# Altium PCB Sensor_Box_Simple_IO.PCBDOC
Units mil, origin at the board's own origin, x right, y up, seen from the top; angles counter-clockwise.
Board outline 403.73 x 2876.17 mil, 2 copper layers (Top, Bot), stack 61.855 mil thick; 26 components, 21 nets, 78 pads, 22 vias.
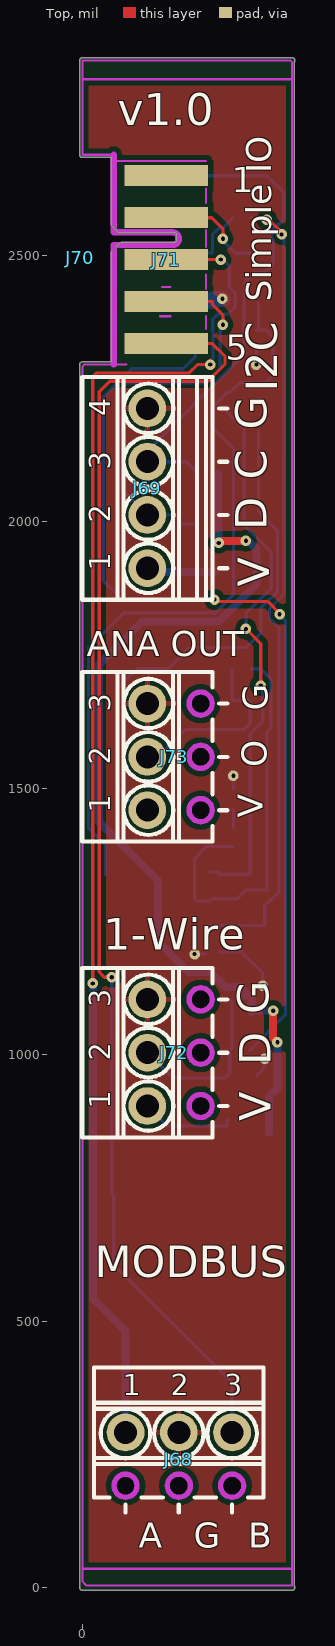
[diagram p0: Top view]
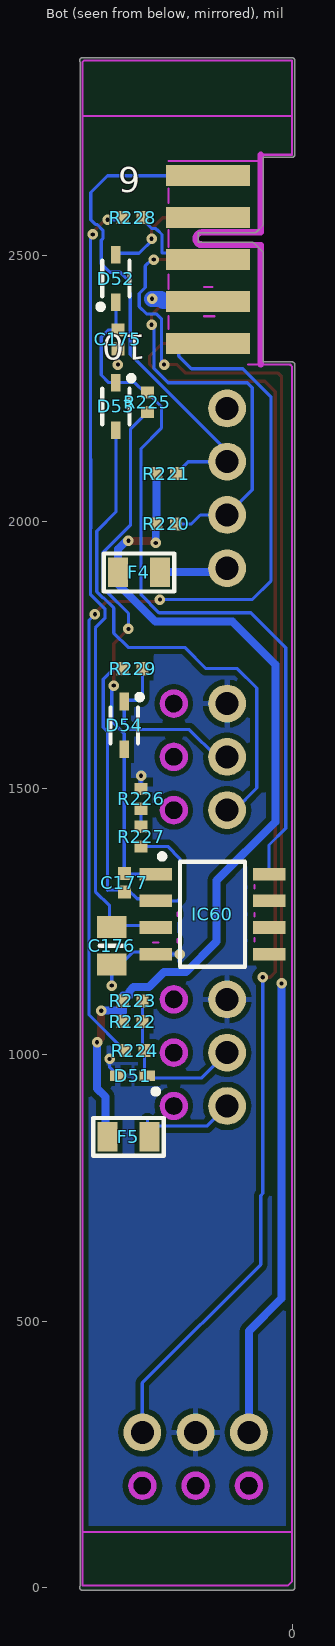
[diagram p1: Bot view, seen from below]
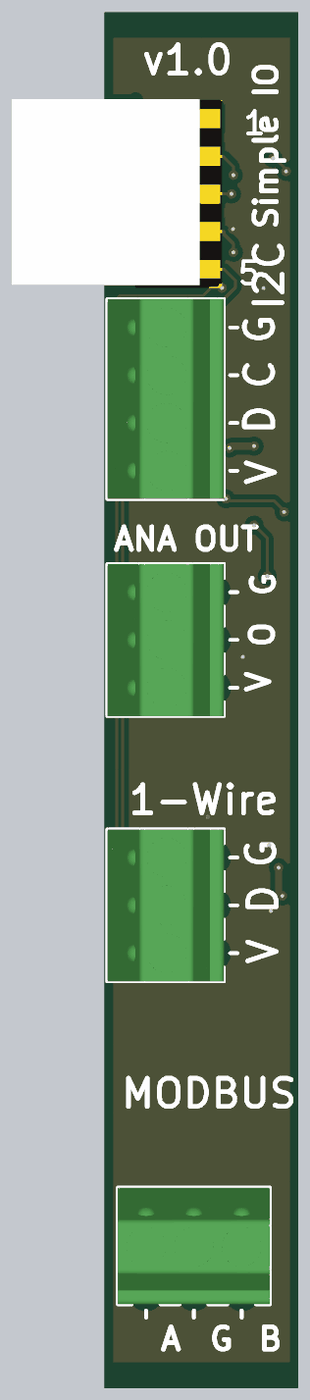
[diagram p2: 3D render of the assembled board from above, using the file's embedded part models]
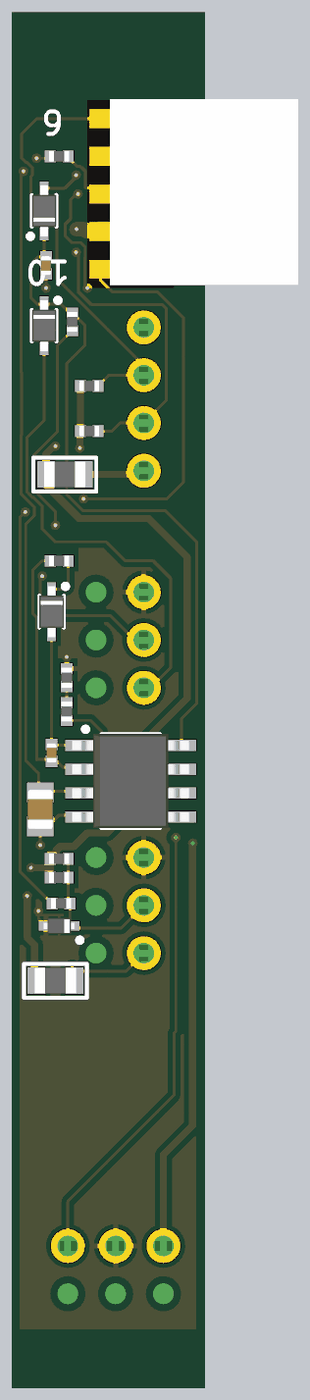
[diagram p3: 3D render of the assembled board from below, using the file's embedded part models]

## Layer stack, top to bottom
TopSolder: solder mask 0.4, Solder Resist, Dk 3.5
Top: signal copper 1.4
Dielectric1: core 59.0551, FR-4, Dk 4.8
Bot: signal copper 1.4
BottomSolder: solder mask 0.4, Solder Resist, Dk 3.5

## Board outline
-5.01,0 ccw(c0,0) 0,-5.02 393.7,-5.02 ccw(c393.7,0) 398.72,0 ccw(c393.7,0) 397.65,3.09 397.65,2863.05 ccw(c393.7,2866.14) 398.72,2866.14 ccw(c393.7,2866.14) 393.7,2871.16 0,2871.16 ccw(c0,2866.14) -5.01,2866.14 -5.01,2688.98 ccw(c0,2688.98) 0,2683.96 54.04,2683.96 54.04,2559.05 ccw(c59.06,2559.05) 55.53,2555.49 55.51,2555.51 67.32,2543.7 67.3,2543.71 ccw(c70.87,2547.24) 70.87,2542.23 176.09,2542.23 176.09,2524.7 74.8,2524.7 ccw(c74.8,2519.68) 71.24,2523.21 71.26,2523.23 55.51,2507.48 55.53,2507.5 ccw(c59.06,2503.94) 54.04,2503.94 54.04,2300.29 0,2300.29 ccw(c0,2295.27) -5.01,2295.27

## Design rules (kind name [scope] priority, off if disabled: settings)
Clearance Clearance_DIFF [(InDifferentialPairClass('All Differential Pairs'))] p1: gap=5 ignorepadtopadclearanceinfootprint=FALSE except(0: Arc-Hole Track-Hole SMDPad-Hole THPad-Hole Via-Hole Fill-Hole Poly-Hole Region-Hole Text-Hole; 10: Arc-Poly Track-Poly SMDPad-Poly THPad-Poly Via-Poly Fill-Poly Poly-Poly Poly-Region Poly-Text)
Clearance [All] p2: gap=6 ignorepadtopadclearanceinfootprint=FALSE except(10: Arc-Poly Track-Poly SMDPad-Poly THPad-Poly Via-Poly Fill-Poly Poly-Poly)
DiffPairsRouting [All] p1: maxlimit=10 minlimit=5 mostfreqgap=5 toplayer_minwidth=5 toplayer_maxwidth=15 toplayer_prefwidth=10 bottomlayer_minwidth=5 bottomlayer_maxwidth=15 bottomlayer_prefwidth=10 maxuncoupledlength=500
FabricationTestPointUsage TestPointUsage [All] p1: valid=0 allowmultiple=FALSE
FabricationTestpoint Testpoint [All] p1: side=3 testpointundercomponent=TRUE minsize=40 maxsize=100 preferedsize=60 minholesize=20 maxholesize=40 preferedholesize=32 testpointgrid=1 allowsidetop=TRUE allowsidebottom=TRUE usegrid=TRUE gridtolerance=0.01
HoleSize [All] p1: absolutevalues=TRUE maxlimit=150 minlimit=1 maxpercent=80.000 minpercent=20.000
HoleToHoleClearance [All] p1: gap=1 allowstackedmicrovias=TRUE
MinimumSolderMaskSliver [All] p1: minsoldermaskwidth=0
PlaneClearance [All] p1: clearance=10
PlaneConnect [All] p1: planeconnectstyle=Direct reliefexpansion=20 reliefentries=4 reliefconductorwidth=10 reliefairgap=10
PolygonConnect PolygonConnect_pad [(InPadClass('All Pads'))] p1: connectstyle=Relief reliefconductorwidth=10 reliefentries=4 polygonreliefangle="90 Angle" airgapwidth=10
PolygonConnect [All] p2: connectstyle=Direct reliefconductorwidth=10 reliefentries=4 polygonreliefangle="45 Angle" airgapwidth=10
RoomDefinition Sensor_Box_Simple_IO [InComponentClass('Sensor_Box_Simple_IO')] p1 off: confinementstyle=ConfineIn formatcopy=TRUE lockcomponents=FALSE outline 793.29,1049.2 7988.16,1049.2 7988.16,1984.24 793.29,1984.24
RoutingVias [All] p1: holewidth=7.87 width=19.68 viastyle="Through Hole" minholewidth=7.87 minwidth=19.68 maxholewidth=28 maxwidth=50
SilkToSilkClearance [All] p1: silktosilkclearance=0
SilkToSolderMaskClearance SilkscreenOverComponentPads [IsPad] p1: minsilkscreentomaskgap=0 clearancetoexposedcopper=TRUE
SolderMaskExpansion [All] p1: expansion=2
Width [All] p1: maxlimit=50 minlimit=5 preferedwidth=5
20 further rules are at their usual default settings.

## Components (designator, comment, footprint, x,y, rotation, side; value= is the part's Value field where it differs from the comment)
C175 "1uF" CAPC1005X55N 326.77,2342.52 r90 bottom
C176 "10uF" CAPC2012X135N 338.58,1204.72 r270 bottom
C177 "18pF" CAPC1005X55N 314.96,1322.83 r270 bottom
D51 "PESD3V3S1UB" SODFL1608X65N 299.21,960.63 r0 bottom
D52 "1N4148WS" SODFL2512X100N 330.71,2456.69 r90 bottom
D53 "1N4148WS" SODFL2512X100N 330.71,2216.54 r270 bottom
D54 "1N4148WS" SODFL2512X100N 314.96,1618.11 r270 bottom
F4 "RFSI050" 0805R 287.4,1905.51 r0 bottom
F5 "RFSI050" 0805R 307.09,846.46 r0 bottom
IC60 "LM358AD" SOIC127P600X175-8N 149.61,1263.78 r180 bottom
J68 "=Family" PHOENIX_1725669 181.1,291.34 r0 top
J69 "=Family" PHOENIX_1725672 122.05,2062.99 r90 top
J70 "=Family" "AVX_00 9159 010 061 916" -3.94,2496.06 r180 top
J71 "=Family" EDGE10T1B6_P200W1000L0F100X400 157.48,2649.61 r270 top
J72 "=Family" PHOENIX_1725669 122.05,1003.94 r90 top
J73 "=Family" PHOENIX_1725669 122.05,1559.06 r90 top
R220 "1k" RESC1005X40N 236.22,1996.06 r180 bottom
R221 "1k" RESC1005X40N 236.22,2090.55 r180 bottom
R222 "10k" RESC1005X40N 299.21,1062.01 r0 bottom
R223 "10k" RESC1005X40N 299.21,1101.38 r0 bottom
R224 "49R9" RESC1005X40N 295.28,1007.87 r0 bottom
R225 "10k" RESC1005X40N 271.65,2224.41 r270 bottom
R226 "10k" RESC1005X40N 283.46,1480.31 r90 bottom
R227 "10k" RESC1005X40N 283.46,1409.45 r90 bottom
R228 "10k" RESC1005X40N 299.21,2570.87 r180 bottom
R229 "10k" RESC1005X40N 299.21,1724.41 r0 bottom

## Footprints (in the part's own frame and the unit in brackets; to place one, negate y for a bottom-side part, rotate by r counter-clockwise, add the part's x,y. Pads: shape width x height; smd on the part's side, far side on the other; paste and mask are expansions set on the pad)
0805R [mm]
  rect 0.95x1.4 smd: 1(-1,0) 2(1,0)
  silkscreen extent -1.68,-0.89 1.68,0.91, body extent -1.1,-0.67 1.1,0.68, height 0.6
"AVX_00 9159 010 061 916" [mil] "10 Contacts, 2mm Pitch, Open Ended Card Edge Connector, 9159 Series"
  body extent -197,-195 197,195, height 67
CAPC1005X55N [mm] "Chip Capacitor, Body 1.0x0.55mm, IPC Medium Density"
  rect 0.62x0.62 smd: 1(-0.45,0) 2(0.45,0)
  body extent -0.52,-0.27 0.53,0.28, height 0.55
CAPC2012X135N [mm] "Chip Capacitor, Body 2.0x1.25mm, IPC Medium Density"
  rect 1.05x1.4 smd: 1(-0.9,0) 2(0.9,0)
  silkscreen extent 0,-0.58 0,0.58, body extent -1.05,-0.67 1.05,0.68, height 1.25
EDGE10T1B6_P200W1000L0F100X400 [mm] "10 contacts Board Edge Connector, First Left Top Pad 1, First Left Bottom Pad 2, Pitch 2mm, Length 0mm, Width 10mm, Finger Lenght 4mm, Finger Width 1mm"
  rect 1x4 smd paste-0.5: 1(0,0) 2(2,0) 3(4,0) 4(6,0) 5(8,0)
  rect 1x4 smd far side paste-0.5: 6(0,0) 7(2,0) 8(4,0) 9(6,0) 10(8,0)
  KeepOutLayer lines w0.3: 9,-2.5 3.3,-2.5 3.3,0.3 ccw(c3,0.3) 2.7,0.3 2.7,-2.5 -1,-2.5
PHOENIX_1725669 [mm] "Micro PCB Terminal Block, Pitch 2.54mm, 3 Positions, Screw Connection"
  round 1.8 hole 1.1: 1(-2.54,0) 2(0,0) 3(2.54,0)
  round 0.5 hole 1.1 unplated mask+0.3: 4(-2.54,-2.54) 5(0,-2.54) 6(2.54,-2.54)
  silkscreen extent -4.04,-3.81 4.04,3.1, body extent -4.04,-3.1 4.04,3.1, height 8.5
PHOENIX_1725672 [mm] "Micro PCB Terminal Block, Pitch 2.54mm, 4 Positions, Screw Connection"
  round 1.8 hole 1.1: 1(-3.81,0) 2(-1.27,0) 3(1.27,0) 4(3.81,0)
  silkscreen extent -5.31,-3.81 5.31,3.1, body extent -5.31,-3.1 5.31,3.1, height 8.5
RESC1005X40N [mm] "Chip Resistor, EIA 0402, Metric 1005, Body 1.0x0.5mm, IPC Medium Density"
  rect 0.58x0.62 smd: 1(-0.47,0) 2(0.47,0)
  body extent -0.52,-0.27 0.53,0.28, height 0.4
SODFL1608X65N [mm] "Ultra Small Outline Diode Flat Lead (SOD-523), Body; 1.2mm L X 0.8mm W X 0.65mm H, IPC Medium Density"
  rect 0.75x0.5 smd: 1(-0.7,0) 2(0.7,0)
  silkscreen extent -1.22,0.63 -0.97,0.87, body extent -0.82,-0.42 0.83,0.43, height 0.65
SODFL2512X100N [mm] "SODFL Diode; 1.70mm W X 1.25mm L X 1.00mm H body, IPC Medium Density"
  rect 0.84x0.46 smd: 1(-1.14,0) 2(1.14,0)
  silkscreen extent -1.47,-0.65 0.85,0.86, body extent -1.35,-0.65 1.35,0.65, height 1
SOIC127P600X175-8N [mm] "SOIC 8, Pitch 1.27mm - Body 4x5mm, IPC Medium Density"
  rect 1.55x0.6 smd: 1(-2.7,1.905) 2(-2.7,0.635) 3(-2.7,-0.635) 4(-2.7,-1.905) 5(2.7,-1.905) 6(2.7,-0.635) 7(2.7,0.635) 8(2.7,1.905)
  silkscreen extent -2.53,-2.5 1.55,2.88, body extent -3.1,-2.5 3.1,2.5, height 1.75

## Part data
C175: library part CC0402_1UF_16V_10%_X5R, "Non-polarised capacitor", Case=0402, Manufacturer=GENERIC, Manufacturer1 ComponentHeight=0.55mm, Manufacturer1 Example=TDK, Manufacturer1 Part Number=C1005X5R1C105KT, Tolerance=±10%, Voltage=16V, Author="CERN DEM JLC", Component Type=Standard, CreateDate=25.10.2012, HelpURL=\\cern.ch\dfs\Applications\Altium\Datasheets\CC0402_X5R_TDK_C.pdf, LatestRevisionDate=25.10.2012, Manufacturer Part Number=CC0402_1UF_16V_10%_X5R, Mounted=Yes, Part Description="SMD Multilayer Chip Ceramic Capacitor", Part Number=CC0402_1UF_16V_10%_X5R, Pin Count=2, Sense=No, SMD=Yes, Socket=No, Status=Preferred, TC=X5R
C176: library part CC0805_10UF_16V_10%_X5R, "Non-polarised capacitor", Case=0805, Manufacturer=GENERIC, Manufacturer1 ComponentHeight=1.4mm, Manufacturer1 Example=KEMET, Manufacturer1 Part Number=C0805C106K4PAC, Tolerance=±10%, Voltage=16V, Author="CERN DEM JLC", Component Type=Standard, CreateDate=03.12.2007, HelpURL=\\cern.ch\dfs\Applications\Altium\Datasheets\CC1206_X5R_KEMET.pdf, LatestRevisionDate=03.12.2007, Manufacturer Part Number=CC0805_10UF_16V_10%_X5R, Mounted=Yes, Part Description="SMD Multilayer Chip Ceramic Capacitor", Part Number=CC0805_10UF_16V_10%_X5R, Pin Count=2, Sense=No, SMD=Yes, Socket=No, Status=Preferred, TC=X5R
C177: library part CC0402_18PF_50V_5%_C0G, "Non-polarised capacitor", Case=0402, Manufacturer=GENERIC, Manufacturer1 ComponentHeight=0.55mm, Manufacturer1 Example=KEMET, Manufacturer1 Part Number=C0402C180J5GACTU, Tolerance=±5%, Voltage=50V, Author="CERN DEM JLC", Component Type=Standard, CreateDate=04.10.2016, HelpURL="\\cern.ch\dfs\Applications\Altium\Datasheets\CC0805_C0G_KEMET_(Commercial Grade).pdf", LatestRevisionDate=04.10.2016, Manufacturer Part Number=CC0402_18PF_50V_5%_C0G, Mounted=Yes, Part Description="SMD Multilayer Chip Ceramic Capacitor", Part Number=CC0402_18PF_50V_5%_C0G, Pin Count=2, Sense=No, SMD=Yes, Socket=No, Status=Preferred, TC=C0G/NP0
D51: "ESD protection diode", Case=SOD523, Manufacturer="NXP SEMICONDUCTORS", Power=330W, Voltage=3V3, Author="CERN DEM JLC", Bonding=No, ComponentHeight=0.65mm, Component Type=Standard, CreateDate=29.11.2012, Device=PESD3V3S1UB, HelpURL=\\cern.ch\dfs\Applications\Altium\Datasheets\PESD3V3S1UB.pdf, LatestRevisionDate=29.11.2012, Manufacturer Part Number=PESD3V3S1UB, Mounted=Yes, PackageDescription="Ultra Small Outline Diode Flat Lead (SOD-523), Body; 1.2mm L X 0.8mm W X 0.65mm H, IPC Medium Density", Part Description="ESD protection diode (23kV)", Part Number=PESD3V3S1UB, Pin Count=2, PressFit=No, Sense=No, SMD=Yes, Socket=No
D52 D53 D54: "Diode", Case=SOD-323F, Manufacturer="FAIRCHILD SEMICONDUCTOR", Power=150mA, Voltage=75V, Author="CERN DEM JLC", Bonding=No, ComponentHeight=1mm, Component Type=Standard, CreateDate=12.05.2011, Device=1N4148WS, HelpURL=\\cern.ch\dfs\Applications\Altium\Datasheets\1N4148WS.pdf, LatestRevisionDate=12.05.2011, Manufacturer Part Number=1N4148WS, Mounted=Yes, PackageDescription="SODFL Diode; 1.70mm W X 1.25mm L X 1.00mm H body, IPC Medium Density", Part Description="Small Signal Diodes", Part Number=1N4148WS, Pin Count=2, PressFit=No, Sense=No, SMD=Yes, Socket=No
F4 F5: library part F_PTC_0.05A, "50mA polymer FUSE"
IC60: "Dual Operational Amplifier", Case=SOIC8, Manufacturer="TEXAS INSTRUMENTS", Author="CERN DEM JLC", Bonding=No, ComponentHeight=1.75mm, Component Type=Standard, CreateDate=02.12.2008, Device=LM358AD, HelpURL=\\cern.ch\dfs\Applications\Altium\Datasheets\LM358AD.pdf, LatestRevisionDate=13.04.2010, Manufacturer Part Number=LM358AD, Mounted=Yes, PackageDescription="SOIC 8, Pitch 1.27mm - Body 4x5mm, IPC Medium Density", Part Description="Dual Operational Amplifier", Part Number=LM358AD, Pin Count=8, PressFit=No, Sense=No, SMD=Yes, Socket=No
J68 J72 J73: library part PHOENIX_1725669, "Terminal Block, 3 Positions, Screw Connection", Manufacturer="PHOENIX CONTACT", Manufacturer Part Number="1725669 (MPT 0,5/3-2,54)", Author="CERN DEM JMW", ComponentHeight=8.5mm, Component Type=Standard, CreateDate=07.11.2008, HelpURL=\\cern.ch\dfs\Applications\Altium\Datasheets\PHOENIX_1725669.pdf, LatestRevisionDate=26.04.2010, Mounted=Yes, Part Description="6A, 63V, Terminal Block, Pitch 2.54mm, 3 Positions, Screw Connection", Part Number=PHOENIX_1725669, Pin Count=3, PressFit=No, Sense=No, SMD=No, Socket=No, Status=None
J69: library part PHOENIX_1725672, "Terminal Block, 4 Positions, Screw Connection", Manufacturer="PHOENIX CONTACT", Manufacturer Part Number="1725672 (MPT 0,5/4-2,54)", Author="CERN DEM JMW", ComponentHeight=8.5mm, Component Type=Standard, CreateDate=07.11.2008, HelpURL=\\cern.ch\dfs\Applications\Altium\Datasheets\PHOENIX_1725672.pdf, LatestRevisionDate=26.04.2010, Mounted=Yes, Part Description="6A, 63V, Terminal Block, Pitch 2.54mm, 4 Positions, Screw Connection", Part Number=PHOENIX_1725672, Pin Count=4, PressFit=No, Sense=No, SMD=No, Socket=No, Status=None
J70: library part "AVX_00 9159 010 061 916", "Open Ended Card Edge Connector, 9159 Series", Manufacturer=AVX, Manufacturer Part Number="00 9159 010 061 916", Author="CERN DEM MR", ComponentHeight=1.6mm, Component Type=Standard, CreateDate=13.02.2018, HelpURL="\\cern.ch\dfs\Applications\Altium\Datasheets\AVX_00 9159 010 061 916.pdf", LatestRevisionDate=13.02.2018, Mounted=Yes, Part Description="10 Contacts, 2mm Pitch, Open Ended Card Edge Connector, 9159 Series", Part Number="AVX_00 9159 010 061 916", Pin Count=10, PressFit=No, Sense=No, SMD=No, Socket=No, Status=None
J71: library part EDGE10T1B6_P200W1000L0F100X400, "PCB Edge Connector 10 (2x5)", Author="CERN DEM MR", ComponentHeight=0mm, Component Type="Standard (No BOM)", CreateDate=14.02.2018, HelpURL=\\cern.ch\dfs\Applications\Altium\Datasheets\EDGE10T1B6_P200W1000L0F100X400.pdf, LatestRevisionDate=14.02.2018, Mounted=No, Part Description="10 Contacts Board Edge Connector, Pitch 2mm, Length 0mm, Width 10mm, Finger Lenght 4mm, Finger Width 1mm", Part Number=EDGE10T1B6_P200W1000L0F100X400, Pin Count=10, PressFit=No, Sense=No, SMD=No, Socket=No, Status=None
R220 R221: library part R0402_1K_1%_0.0625W_100PPM, "Resistor - 1%", Case=0402, Manufacturer=GENERIC, Manufacturer1 ComponentHeight=0.4mm, Manufacturer1 Example="YAGEO PHYCOMP", Manufacturer1 Part Number=232270671002L, Power=0.0625W, Tolerance=±1%, Author="CERN DEM JLC", Component Type=Standard, CreateDate=03.12.2007, HelpURL=\\cern.ch\dfs\Applications\Altium\Datasheets\R0402_Phycomp_RC0402.pdf, LatestRevisionDate=17.10.2012, Manufacturer Part Number=R0402_1K_1%_0.0625W_100PPM, Mounted=Yes, Part Description="General Purpose Thick Film Chip Resistor", Part Number=R0402_1K_1%_0.0625W_100PPM, Pin Count=2, PressFit=No, Sense=No, SMD=Yes, Socket=No, Status="Not Recommended", TC=±100ppm/°C
R222 R223 R225 R226 R227 R228 R229: library part R0402_10K_1%_0.0625W_100PPM, "Resistor - 1%", Case=0402, Manufacturer=GENERIC, Manufacturer1 ComponentHeight=0.4mm, Manufacturer1 Example="YAGEO PHYCOMP", Manufacturer1 Part Number=232270671003L, Power=0.0625W, Tolerance=±1%, Author="CERN DEM JLC", Component Type=Standard, CreateDate=2007-12-03, HelpURL=\\cern.ch\dfs\Applications\Altium\Datasheets\R0402_Phycomp_RC0402.pdf, LatestRevisionDate=2012-10-17, Manufacturer Part Number=R0402_10K_1%_0.0625W_100PPM, Mounted=Yes, Part Description="General Purpose Thick Film Chip Resistor", Part Number=R0402_10K_1%_0.0625W_100PPM, Pin Count=2, SMD=Yes, Socket=No, Status="Not recommended", Table="Resistors SMD", TC=±100ppm/°C
R224: library part R0402_49R9_1%_0.0625W_100PPM, "Resistor - 1%", Case=0402, Manufacturer=GENERIC, Manufacturer1 ComponentHeight=0.4mm, Manufacturer1 Example="YAGEO PHYCOMP", Manufacturer1 Part Number="232270674999L or RC0402FR-0749R9L", Power=0.0625W, Tolerance=±1%, Author="CERN DEM JLC", Component Type=Standard, CreateDate=2012-10-24, HelpURL=\\cern.ch\dfs\Applications\Altium\Datasheets\R0402_Phycomp_RC0402.pdf, LatestRevisionDate=2012-10-24, Manufacturer Part Number=R0402_49R9_1%_0.0625W_100PPM, Mounted=Yes, Part Description="General Purpose Thick Film Chip Resistor", Part Number=R0402_49R9_1%_0.0625W_100PPM, Pin Count=2, SMD=Yes, Socket=No, Status="Not recommended", Table="Resistors SMD", TC=±100ppm/°C

## Via types
v1: diameter 19.68, hole 7.87, Top to Bot, tented both sides, 22 vias

## Nets (pads, with @x,y where several pads share a name; then routed paths per layer and width w, separated by ;. In a path a pad name is that pad's centre, name@x,y a point inside that pad or via, vN(x,y) a via of type N, cw(c..) or ccw(c..) an arc to the next point about the centre after c; other vN are vias at no path point)
GND: C175.1 C176.2 D51.2 IC60.4 J68.2 J69.4 J71.9 J72.3 J73.3 R226.2 | length 347.8
  Bot w6: v1(210.63,1188.98) IC60.4@232.28,1188.98 ; IC60.4@255.91,1192.72 299.41,1192.72 338.58,1153.54 v1(338.58,1129.92) ; R226.2 v1(283.46,1523.62) ; D51.2 342.52,976.38 v1(342.52,992.13) ; v1(326.77,2295.28) C175.1
  Bot w30: J71.9 162.66,2418.57 218.24,2418.57 222.77,2414.04 241.8,2414.04 246.32,2418.57 v1(262.89,2418.57)
IO0: J71.8 R228.2 | length 178.8
  Bot w6: J71.8 212.6,2492.13 226.5,2506.02 227.74,2504.78 244.09,2504.78 244.09,2539.37 251.97,2547.24 252.88,2547.24 255.97,2550.34 262.94,2550.34 280.71,2568.11 R228.2
IO1: J71.10 R224.2 | length 1826
  Top w6: v1(248.03,1854.33) 251.97,1850.39 348.55,1850.39 370.08,1828.87 v1(370.08,1826.77)
  Bot w6: J71.10 192.91,2334.65 212.6,2314.96 212.6,2311.02 188.98,2287.4 92.83,2287.4 39.37,2233.94 39.37,1889.76 74.8,1854.33 v1(248.03,1854.33) ; R224.2 381.14,1075.24 381.14,1815.7 v1(370.08,1826.77)
MODBUS_A: J68.1 J71.3 | length 2591
  Top w6: v1(19.69,1133.86) 19.69,2272.05 27.17,2279.53 200.79,2279.53 216.54,2295.28 232.28,2295.28 240.15,2303.14 v1(240.15,2295.28) ; J71.3 v1(259.84,2492.13)
  Bot w6: v1(240.15,2295.28) 245.22,2300.34 245.22,2358.06 244.94,2358.34 244.94,2380.4 254.92,2390.39 273.31,2390.39 286.89,2403.97 286.89,2428.51 275.59,2439.81 275.59,2480.31 263.78,2492.13 v1(259.84,2492.13)
  Bot w15: v1(19.69,1133.86) 19.93,1134.11 19.93,543.06 81.1,481.89 J68.1
MODBUS_B: J68.3 J71.5 | length 2456.7
  Top w6: v1(55.12,1145.67) 41.34,1145.67 31.69,1155.32 31.69,2244.28 51.18,2263.78 235.31,2263.78 267.72,2296.18 267.72,2311.02 244.09,2334.65 J71.5
  Bot w6: v1(55.12,1145.67) 55.12,739.66 59.06,735.72 59.06,606.3 281.1,384.25 J68.3
NetC175_2: C175.2 D52.1 D53.1 IC60.8 R225.1 | length 1418.8
  Bot w6: IC60.8 43.31,1393.7 11.81,1425.2 11.81,1763.78 77.65,1829.61 249.96,1829.61 283.46,1863.12 283.46,2137.8 245.28,2175.98 245.28,2216.54 R225.1 277.03,2242.91 295.54,2261.42 D53.1 344.09,2261.42 358.27,2275.59 358.27,2346.46 344.49,2360.24 C175.2 330.71,2364.17 D52.1
NetC176_1: C176.1 IC60.3 R228.1 | length 1508.1
  Top w6: v1(346.46,2566.93) 350.39,2566.93 374.02,2543.31 v1(374.02,2539.36)
  Bot w6: IC60.3@236.22,1242.72 343.9,1242.72 342.52,1244.09 342.52,1279.53 369.14,1306.15 369.14,1801.06 351.24,1818.96 351.24,1837.05 378.47,1864.28 378.47,1988.19 ; R228.1 321.65,2566.93 v1(346.46,2566.93) ; v1(374.02,2539.36) 378.47,2534.91 378.47,2118.11 ; 377.95,1988.19 377.95,2118.11
NetC177_1: C177.1 D54.2 IC60.1 R225.2 | length 1022.4
  Top w6: v1(307.09,1799.21) 334.65,1771.65 v1(334.65,1692.91)
  Bot w6: IC60.1@236.22,1342.72 IC60.1@255.91,1342.72 ; IC60.1 313.19,1338.78 C177.1 D54.2 314.96,1602.36 338.58,1625.98 338.58,1688.97 v1(334.65,1692.91) ; R225.2 303.15,2174.41 303.15,1994.36 354.47,1943.04 354.47,1874.22 349.2,1868.95 347.79,1868.95 307.09,1828.25 v1(307.09,1799.21)
NetC177_2: C177.2 IC60.2 R227.1 R229.2 | length 748
  Bot w6: R227.1 233.46,1390.94 210.63,1368.11 210.63,1293.31 215.16,1288.78 240.16,1288.78 244.09,1292.72 290.75,1292.72 307.09,1309.06 345.67,1309.06 346.46,1308.27 346.46,1606.3 354.33,1614.17 354.33,1704.72 334.65,1724.41 R229.2
NetD51_1: D51.1 J72.2 R222.1 R223.1 R224.1 | length 315.3
  Bot w6: J72.2 169.29,956.69 267.72,956.69 D51.1 276.77,965.75 R224.1 280.71,1011.81 R222.1 R223.1
NetD53_2: D53.2 J73.1 | length 980.7
  Bot w6: J73.1 107.87,1459.06 66.25,1500.68 66.25,1688.29 102.61,1724.66 161.67,1724.66 201.46,1764.46 307.76,1764.46 334.65,1791.34 334.65,1838.58 353.02,1856.95 354.17,1856.95 366.47,1869.25 366.47,1982.7 330.71,2018.46 D53.2
NetD54_1: D54.1 J73.2 R229.1 | length 352.6
  Bot w6: J73.2 141.73,1559.06 192.91,1610.24 303.15,1610.24 314.96,1622.05 D54.1 312.6,1665.35 283.46,1665.35 280.71,1668.11 R229.1
NetF4_1: F4.1 J69.1 | length 129.1
  Bot w15: J69.1 129.53,1905.51 F4.1
NetF5_1: F5.1 J72.1 | length 177.1
  Bot w6: J72.1 159.84,866.14 271.65,866.14 271.65,877.95
NetR226_1: R226.1 R227.2 | length 33.9
  Bot w6: R227.2@283.47,1425.79 R226.1@283.47,1459.65
P3V3: F4.2 F5.2 R220.1 R221.1 R222.2 R223.2 | length 1731.8
  Top w15: v1(255.91,1960.63) 259.84,1964.57 v1(307.09,1964.57) ; v1(358.27,1082.68) 358.27,1031.5 v1(366.14,1023.62)
  Bot w15: R221.1 R220.1 255.91,1994.88 v1(255.91,1960.63) ; v1(307.09,1964.57) 311.02,1964.57 326.77,1948.82 F4.2 326.77,1883.09 256.8,1813.11 112.33,1813.11 31.5,1732.28 31.5,1437.01 141.73,1326.77 141.73,1212.6 198.82,1155.51 240.16,1155.51 268.59,1127.08 297.72,1127.08 305.63,1119.18 305.63,1111.22 317.72,1111.22 R223.2 317.72,1080.12 320.27,1082.68 v1(358.27,1082.68) ; F5.2@350.39,854.33 350.39,921.16 366.19,936.96 366.14,937.01 v1(366.14,1023.62)
P5V0: J71.1
P12V0: D52.2 J71.2 | length 220.6
  Top w6: J71.2 242.92,2570.87 263.78,2550 v1(263.78,2531.5)
  Bot w6: v1(263.78,2531.5) 259.84,2531.5 287.4,2503.94 328.35,2503.94 D52.2
PWM1: J71.7
SCL/Rx: J69.3 J71.6 R221.2 | length 965.5
  Bot w6: J71.6 346.46,2649.61 377.95,2618.11 377.95,2566.93 369.23,2558.21 366.21,2558.21 355.17,2547.17 355.17,2531.56 358.27,2528.47 358.27,2484.25 342.52,2468.5 322.83,2468.5 305.12,2450.79 305.12,2430.24 303.62,2428.75 303.62,2314.5 122.05,2132.93 J69.3 195.28,2112.99 R221.2
SDA/Tx: J69.2 J71.4 R220.2 | length 782.8
  Top w6: J71.4 244.05,2413.39 244.05,2407.88 255.91,2396.03 263.78,2388.15 v1(263.78,2370.07)
  Bot w6: R220.2 188.98,1996.06 172.05,2012.99 J69.2 74.8,2060.24 74.8,2251.97 83.88,2261.05 232.57,2261.05 258.99,2287.47 258.99,2365.29 v1(263.78,2370.07)
pads on no net: IC60.5 IC60.6 IC60.7 J68.4 J68.5 J68.6 J72.4 J72.5 J72.6 J73.4 J73.5 J73.6

## Polygon pours and split planes (outlines as drawn)
GND on Bot "Signal Layer 1-No Net 1" (solid, remove dead copper, pour order 2): 0,2866.14 389.76,2866.14 393.7,2870.08 393.7,0 0,0
GND on Top "Signal Layer 1-No Net 1" (solid, remove dead copper, pour order 0): 0,2866.14 397.64,2866.14 397.64,3.94 393.7,0 0,0

## Keep-outs
Top:
  lines w3.94: 0,35.43 393.7,35.43 ; 0,2830.71 393.7,2830.71
Bot:
  lines w3.94: 0,104.33 393.7,104.33 ; 0,2761.81 393.7,2761.81 ; 70.87,1212.6 70.87,1218.98 ; 70.87,1259.84 70.87,1266.22 ; 70.87,1312.52 70.87,1318.9 ; 215.39,1210.59 215.39,1216.97 ; 215.39,1260.59 215.39,1266.97 ; 250.91,1210.59 260.91,1210.59
KeepOutLayer:
  lines w3.94: 59.06,2688.98 0,2688.98 0,2866.14 ; 62.99,2677.17 232.28,2677.17 ; 82.68,2295.28 3.94,2295.28 0,2291.34 0,11.81 7.87,3.94 393.7,3.94 393.7,2862.2 389.76,2866.14 0,2866.14 ; 145.67,2385.83 165.35,2385.83 ; 149.61,2440.94 165.35,2440.94 ; 232.28,2362.2 232.28,2385.83 ; 232.28,2437.01 232.28,2464.57 ; 232.28,2515.75 232.28,2547.24 ; 232.28,2598.43 232.28,2625.98 ; 0,2866.14 0,2866.14
  lines w10: 102.42,187.53 cw(c81.1,191.34) 102.76,191.34 ; 202.42,187.53 cw(c181.1,191.34) 202.76,191.34 ; 243.36,900.13 cw(c222.05,903.94) 243.7,903.94 ; 243.36,1000.13 cw(c222.05,1003.94) 243.7,1003.94 ; 243.36,1100.13 cw(c222.05,1103.94) 243.7,1103.94 ; 243.36,1455.25 cw(c222.05,1459.06) 243.7,1459.06 ; 243.36,1555.25 cw(c222.05,1559.06) 243.7,1559.06 ; 243.36,1655.25 cw(c222.05,1659.06) 243.7,1659.06 ; 302.42,187.53 cw(c281.1,191.34) 302.76,191.34

## Silkscreen, mask and mechanical layers (free items; w line width, h text height)
TopOverlay:
  text "v1.0" at 66.93,2744.09 h60
  text "Simple IO" at 354.33,2413.39 h47.24 r90
  text "I2C" at 366.14,2244.09 h59.06 r90
  text "G" at 346.46,2173.23 h59.06 r90
  text "C" at 346.46,2078.74 h59.06 r90
  text "D" at 346.46,1984.25 h59.06 r90
  text "V" at 350.39,1877.95 h59.06 r90
  text "ANA OUT" at 7.87,1748.03 h47.24
  text "G" at 348.43,1645.67 h47.24 r90
  text "O" at 346.46,1539.37 h47.24 r90
  text "V" at 338.58,1444.88 h47.24 r90
  text "1-Wire" at 39.37,1196.85 h59.06
  text "G" at 349.61,1076.4 h59.06 r90
  text "D" at 353.55,980.34 h59.06 r90
  text "V" at 353.55,875.62 h59.06 r90
  text "MODBUS" at 23.62,582.68 h59.06
  text "A" at 106.3,74.8 h47.24
  text "G" at 208.66,74.8 h47.24
  text "B" at 311.02,74.8 h47.24
Mechanical1:
  lines w7.87: 393.7,0 393.7,2866.14
  lines w10: 393.7,0 0,0 0,2295.27 ; 393.7,2866.14 0,2866.14 0,2688.98 59.06,2688.98 59.06,2559.05 70.87,2547.24 181.1,2547.24 181.1,2531.5 181.1,2519.68 74.8,2519.68 59.06,2503.94 59.06,2295.27 ; 0,2295.27 59.06,2295.27 ; 0,2295.27 59.06,2295.27

## Text inside footprints (layer, text, board x,y; h text height)
J68: TopOverlay "1" at 76.1,361.34 h39.37; TopOverlay "2" at 166.1,361.34 h39.37; TopOverlay "3" at 266.1,361.34 h39.37
J69: TopOverlay "3" at 52.05,2097.99 h39.37 r90; TopOverlay "2" at 52.05,1997.99 h39.37 r90; TopOverlay "1" at 52.05,1907.99 h39.37 r90; TopOverlay "4" at 52.05,2197.99 h39.37 r90
J71: TopOverlay "5" at 268.7,2303.94 h47.24; TopOverlay "1" at 280.51,2618.11 h47.24; BottomOverlay "10" at 273.62,2351.18 h47.24 r180; BottomOverlay "6" at 285.43,2665.35 h47.24 r180
J72: TopOverlay "1" at 52.05,898.94 h39.37 r90; TopOverlay "2" at 52.05,988.94 h39.37 r90; TopOverlay "3" at 52.05,1088.94 h39.37 r90
J73: TopOverlay "1" at 52.05,1454.06 h39.37 r90; TopOverlay "2" at 52.05,1544.06 h39.37 r90; TopOverlay "3" at 52.05,1644.06 h39.37 r90